# Altium PCB Fingerboardv5_Commerical_China.PcbDoc
Units mil, origin at the board's own origin, x right, y up, seen from the top; angles counter-clockwise.
Board outline 600 x 1050 mil, 2 copper layers (Top Layer, Bottom Layer); 12 components, 14 nets, 70 pads, 13 vias.
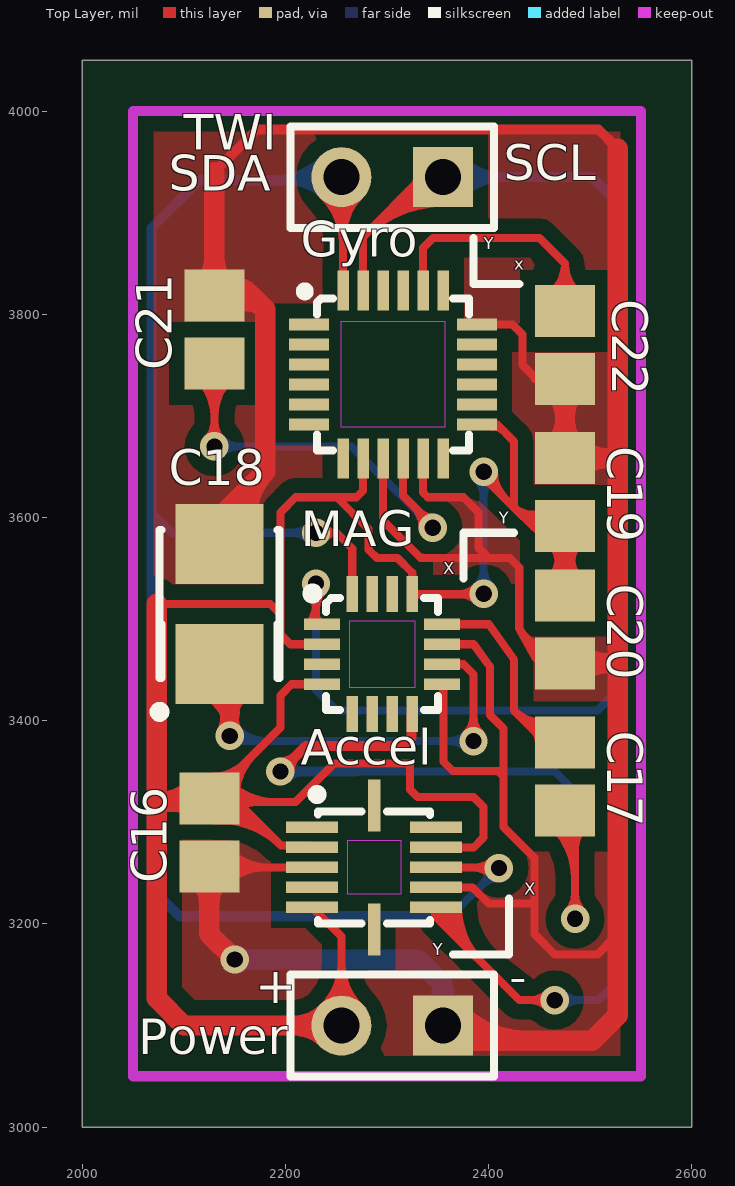
[diagram p0: Top Layer view]
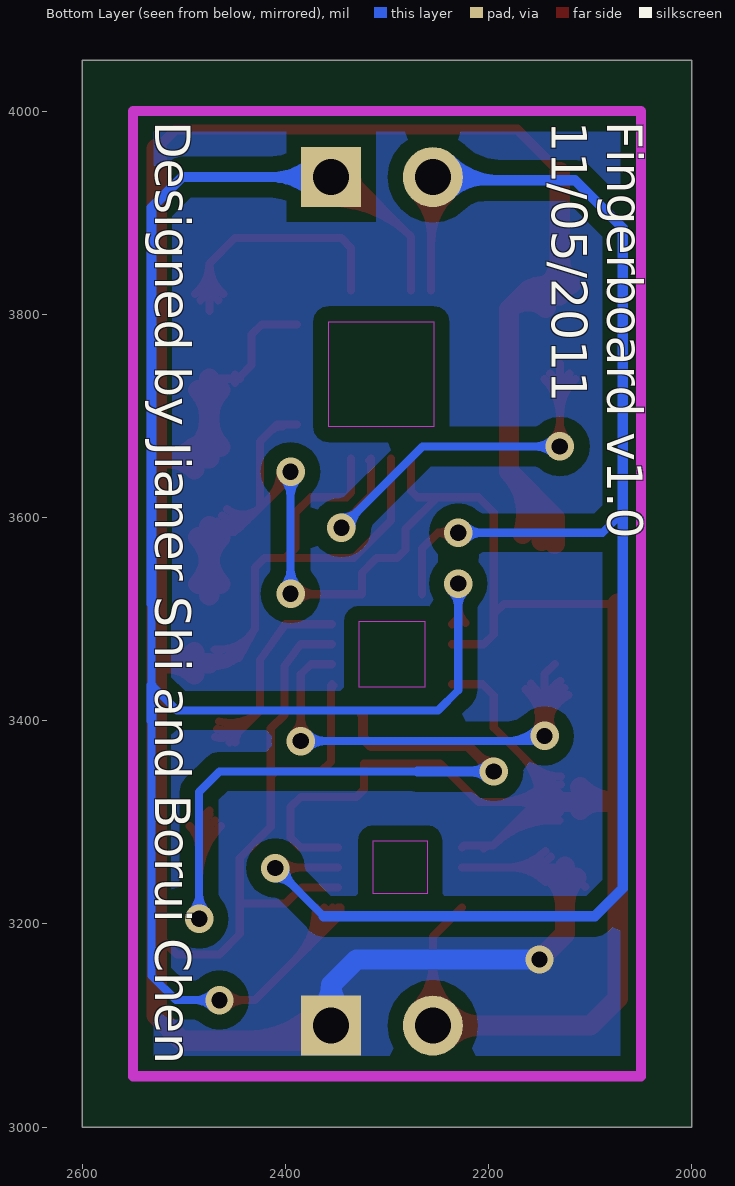
[diagram p1: Bottom Layer view, seen from below]

## Layer stack, top to bottom
Top Layer: signal copper 1.4
Dielectric: dielectric 12.6, FR-4, Dk 4.8
Bottom Layer: signal copper 1.4

## Board outline
2000,3000 2600,3000 2600,4050 2000,4050

## Design rules (kind name [scope] priority, off if disabled: settings)
Clearance "Polygon Clearance" [InPolygon] p1: gap=15
Clearance [All] p2: gap=8.1
HoleSize [All] p1: absolutevalues=TRUE maxlimit=100 minlimit=16 maxpercent=80.000 minpercent=20.000
MinimumAnnularRing [All] p1: minimumring=6
PolygonConnect [All] p1: connectstyle=Direct reliefconductorwidth=10 reliefentries=4 polygonreliefangle="90 Angle"
RoutingVias [All] p1: holewidth=16 width=28 viastyle="Through Hole" minholewidth=16 minwidth=27 maxholewidth=16 maxwidth=35
SilkscreenOverComponentPads [All] p1: minsilkscreentomaskgap=10
SolderMaskExpansion [All] p1: expansion=4
Width [All] p1: maxlimit=50 minlimit=8 preferedwidth=8
26 further rules are at their usual default settings.

## Classes and differential pairs
net class TWI[1..0]: TWI0 TWI1
net class AUX_TWI[1..0]: AUX_TWI0 AUX_TWI1
component class U_IMU3000: C19 C20 C21 C22 Gyro
component class U_HMC5883L: C17 C18 MAG
component class U_BMA180: Accel C16
component class Fingerboard: Power TWI

## Components (designator, comment, footprint, x,y, rotation, side; value= is the part's Value field where it differs from the comment)
Accel "BMA180" "BMA180 - ECESHOP" 2240,3295 r270 top
C16 "Cap Semi" CAPC2012N 2125,3290 r90 top
C17 "Cap Semi" CAPC2012N 2475,3345 r90 top
C18 "Cap Pol1" TC3528-1411 2135,3515 r90 top
C19 "Cap Semi" CAPC2012N 2475,3625 r270 top
C20 "Cap Semi" CAPC2012N 2475,3490 r90 top
C21 "Cap Semi" CAPC2012N 2130,3785 r270 top
C22 "Cap Semi" CAPC2012N 2475,3770 r90 top
Gyro "IMU3000" "IMU3000 - ECESHOP" 2235,3790 r0 top
MAG "HMC5883L" "HMC5883L - ECESHOP" 2245,3495 r0 top
Power "Header 2" HDR1X2 2355,3100 r180 top
TWI "TWI" HDR1X2 2355,3935 r180 top

## Footprints (in the part's own frame and the unit in brackets; to place one, negate y for a bottom-side part, rotate by r counter-clockwise, add the part's x,y. Pads: shape width x height; smd on the part's side, far side on the other; paste and mask are expansions set on the pad)
"BMA180 - ECESHOP" [mm] "BMA180 - ECESHOP"
  rect 0.29x1.3 smd: 1(0,-0.35) 2(0.5,-0.35) 3(1,-0.35) 4(1.5,-0.35) 5(2,-0.35) 7(2,2.75) 8(1.5,2.75) 9(1,2.75) 10(0.5,2.75) 11(0,2.75)
  rect 1.3x0.32 smd: 6(2.55,1.2) 12(-0.55,1.2)
  Keep-Out Layer region: 0.328,0.524 1.658,0.524 1.658,1.876 0.328,1.876
  silkscreen extent -0.91,-0.31 2.4,2.6
CAPC2012N [mm] "Chip Capacitor, Body 2.0x1.3mm, IPC Medium Density"
  rect 1.3x1.5 smd: 1(-0.85,0) 2(0.85,0)
  body extent -1.1,-0.72 1.1,0.72, height 1.1
HDR1X2 [mm] "Connector; Header; 2 Position"
  rect 1.5x1.5 hole 0.9: 1(0,0)
  round 1.5 hole 0.9: 2(2.54,0)
  silkscreen extent -1.27,-1.27 3.81,1.27
"HMC5883L - ECESHOP" [mm]
  rect 0.9x0.29 smd: 1(-0.225,0) 2(-0.225,-0.5) 3(-0.225,-1) 4(-0.225,-1.5) 9(2.775,-1.5) 10(2.775,-1) 11(2.775,-0.5) 12(2.775,0)
  rect 0.29x0.9 smd: 5(0.525,-2.25) 6(1.025,-2.25) 7(1.525,-2.25) 8(2.025,-2.25) 13(2.025,0.75) 14(1.525,0.75) 15(1.025,0.75) 16(0.525,0.75)
  Keep-Out Layer region: 0.452,-1.572 2.099,-1.572 2.099,0.075 0.452,0.075
  silkscreen extent -0.57,-2.15 2.67,0.87
"IMU3000 - ECESHOP" [mm]
  rect 1x0.29 smd: 1(-0.3,0) 2(-0.3,-0.5) 3(-0.3,-1) 4(-0.3,-1.5) 5(-0.3,-2) 6(-0.3,-2.5) 13(3.9,-2.5) 14(3.9,-2) 15(3.9,-1.5) 16(3.9,-1) 17(3.9,-0.5) 18(3.9,0)
  rect 0.29x1 smd: 7(0.55,-3.35) 8(1.05,-3.35) 9(1.55,-3.35) 10(2.05,-3.35) 11(2.55,-3.35) 12(3.05,-3.35) 19(3.05,0.85) 20(2.55,0.85) 21(2.05,0.85) 22(1.55,0.85) 23(1.05,0.85) 24(0.55,0.85)
  Keep-Out Layer region: 0.488,-2.562 3.109,-2.562 3.109,0.066 0.488,0.066
  silkscreen extent -0.48,-3.15 3.7,0.9
TC3528-1411 [mm] "Capacitor, SM Tantalum; Body 3.5 x 2.8 mm (LxW typ)"
  rect 2x2.2 smd: 1(-1.5,0) 2(1.5,0)
  silkscreen extent -2.82,-1.5 1.85,1.62

## Part data
C16 C17 C19 C20 C21 C22: "Capacitor (Semiconductor SIM Model)"
C18: "Polarized Capacitor (Radial)"
Power: "Header, 2-Pin"
TWI: library part "Header 2", "Header, 2-Pin"

## Via types
v1: diameter 28, hole 16, Top Layer to Bottom Layer, 13 vias

## Nets (pads, with @x,y where several pads share a name; then routed paths per layer and width w, separated by ;. In a path a pad name is that pad's centre, name@x,y a point inside that pad or via, vN(x,y) a via of type N, cw(c..) or ccw(c..) an arc to the next point about the centre after c; other vN are vias at no path point)
3.3VCC: Accel.2 Accel.5 Accel.10 C16.2 C19.2 C20.2 Gyro.8 Gyro.13 MAG.2 MAG.4 MAG.13 Power.2 | length 3692.5
  Top Layer w8: 2073.1,3515 2185,3515 2195,3505 ; C16.2 C16.2@2125.33,3323.46 ; C16.2@2128.79,3325.87 cw(c2131.14,3287.97) 2157.99,3314.82 ; C16.2@2128.94,3337.06 ccw(c2128.94,3361.15) C16.2@2145.97,3344.11 ; C16.2@2128.94,3345.06 ccw(c2128.94,3388.46) 2159.63,3357.77 ; C16.2@2129.28,3317.88 cw(c2132.61,3264.36) 2170.53,3302.28 ; C16.2@2129.78,3309.9 cw(c2134.07,3240.74) 2183.07,3289.74 ; C16.2@2130.27,3301.92 cw(c2135.54,3217.12) 2195.62,3277.19 ; C16.2@2131.54,3320 C16.2@2152.81,3320 ; C16.2@2138.55,3333.07 ccw(c2170.11,3364.64) 2170.11,3320 ; C16.2@2142.53,3323.46 cw(c2184.06,3323.46) 2154.69,3352.83 ; C16.2@2144.2,3308.2 cw(c2172.7,3279.7) 2172.7,3320 ; C16.2@2144.2,3338.73 ccw(c2189.43,3383.95) 2189.43,3320 ; C16.2@2150.53,3323.46 cw(c2211.37,3323.46) 2168.35,3366.49 ; 2195,3320 2210,3320 2247.9,3357.9 2322.66,3357.9 2322.66,3332.34 2330,3325 2385,3325 2395,3315 2395,3285 2385.32,3275.32 Accel.10 ; 2197.68,3277.19 cw(c2197.68,3266.66) Accel.2@2205.13,3274.11 ; 2205,3320 C16.2@2152.81,3320 ; Accel.5 2255,3187.48 Power.2 ; Accel.2 2224.34,3277.19 2195.62,3277.19 ; MAG.4 2205.95,3435.95 2195,3425 2195,3393.14 C16.2@2125.33,3323.46 ; MAG.2 2205.32,3475.32 2205,3475 2195,3485 2195,3505 ; Power.2@2236.95,3118.05 ccw(c2193.37,3161.63) 2255,3161.63 ccw(c2316.63,3161.63) Power.2@2273.05,3118.05 ; Power.2@2242.61,3112.39 ccw(c2212.68,3142.32) 2255,3142.32 ccw(c2297.32,3142.32) Power.2@2267.39,3112.39 ; Gyro.8 2276.34,3626.34 2270,3620 2250.37,3620 ; 2369.72,3524.53 ccw(c2369.72,3550.28) v1@2387.93,3532.07 ; 2372,3524.53 cw(c2372,3502) v1@2387.93,3517.93 ; Gyro.13 2408.43,3691.57 2425,3675 2425,3610 ; v1(2395,3525) 2394.53,3524.53 MAG.13 2324.72,3545.65 2310.37,3560 2290,3560 2281.77,3568.23 2281.77,3588.6 2250.37,3620 ; v1@2395,3635 cw(c2395,3622.93) 2403.54,3631.46 ; v1(2395,3645) 2395,3640 2425,3610 ; Gyro.13@2402.52,3689.87 cw(c2402.52,3671.48) 2415.52,3684.48 ; v1@2405,3645 ccw(c2441.21,3645) 2415.61,3619.39 ; 2431.28,3603.72 ccw(c2447.8,3620.24) C19.2@2462.5,3602.09 ; 2437.56,3597.44 ccw(c2453.42,3613.3) C19.2@2467.54,3595.88 ; 2443.84,3591.16 ccw(c2459.04,3606.36) C19.2@2472.58,3589.66 ; C19.2@2449.63,3594.1 cw(c2445,3594.66) 2445,3590 ; C19.2@2450.19,3586 ccw(c2445,3584.63) 2445,3590 ; C19.2@2457.47,3608.31 cw(c2442.17,3627.17) 2425,3610 ; C19.2 2473.46,3590 2445,3590 ; C16.2@2125.33,3323.46 2149.34,3323.46 C16.2@2152.81,3320 ; C16.2@2152.81,3320 2195.62,3277.19 ; 2195,3505 2195,3605 2210,3620 2250.37,3620 ; 2425,3610 2445,3590
  Top Layer w20: 2073.1,3515 2073.1,3320 ; 2075.06,3320 ccw(c2075.06,3369.47) C16.2@2110.04,3334.49 ; 2091.79,3320 cw(c2091.79,3294.19) C16.2@2110.04,3312.44 ; C16.2@2131.54,3320 2073.1,3320 ; Power.2@2241.19,3086.19 ccw(c2207.86,3052.86) 2207.86,3100 ccw(c2207.86,3147.14) Power.2@2241.19,3113.81 ; Power.2 2100,3100 2073.1,3126.9 2073.1,3320 ; C20.2@2463.98,3534.49 ccw(c2437.36,3561.1) 2475,3561.1 ccw(c2512.64,3561.1) C20.2@2486.02,3534.49 ; C19.2@2463.98,3580.51 cw(c2437.36,3553.9) 2475,3553.9 cw(c2512.64,3553.9) C19.2@2486.02,3580.51 ; C20.2 C19.2
  Bottom Layer w8: v1@2387.93,3532.07 ccw(c2370.86,3549.14) 2395,3549.14 ccw(c2419.14,3549.14) v1@2402.07,3532.07 ; v1@2387.93,3637.93 cw(c2370.86,3620.86) 2395,3620.86 cw(c2419.14,3620.86) v1@2402.07,3637.93 ; v1(2395,3525) v1@2400,3530 ; v1@2395,3535 v1(2395,3645) v1@2400,3640
AUX_TWI0: Gyro.7
AUX_TWI1: Gyro.6
GND: Accel.3 Accel.8 C16.1 C18.2 C19.1 C20.1 C21.1 C22.1 Gyro.9 Gyro.11 Gyro.18 MAG.9 MAG.11 Power.1 | length 4902.2
  Top Layer w8: C16.1@2105,3236.54 C16.1 2125.91,3255.63 Accel.3 ; C16.1@2138.55,3246.93 cw(c2159.56,3225.91) 2159.56,3255.63 ; C16.1@2138.55,3266.15 ccw(c2163.93,3291.53) 2163.93,3255.63 ; C16.1@2144.2,3241.27 cw(c2178.88,3206.6) 2178.88,3255.63 ; C16.1@2144.2,3271.8 ccw(c2183.25,3310.85) 2183.25,3255.63 ; Gyro.9 2296.02,3597.12 2332.74,3560.4 2334.6,3560.4 2335,3560 2400,3560 ; Gyro.11 2335.39,3624.61 2340,3620 2375,3620 2390,3605 2390,3570 2400,3560 ; Accel.8 2384.05,3235.95 2400,3220 2445,3220 ; MAG.9@2353.04,3434.74 cw(c2347.36,3429.05) 2355.4,3429.05 ; MAG.9 2355.4,3434.8 2355.4,3359.6 2364.6,3350.4 2409.2,3350.4 2414.6,3345 ; MAG.11 2385,3475.32 2401.1,3453.36 2401.1,3405.76 2414.6,3392.26 2414.6,3345 ; Gyro.18 2423.37,3790 2433.37,3780 2433.37,3750 2445,3738.37 2445,3736.63 ; 2430.02,3490.77 ccw(c2465.54,3510.45) C20.1@2469.68,3470.06 ; 2435.89,3480.17 ccw(c2466.88,3497.34) C20.1@2470.49,3462.1 ; 2441.76,3469.57 ccw(c2468.23,3484.23) C20.1@2471.31,3454.14 ; C22.1@2449.83,3732.61 ccw(c2445,3731.71) 2445,3736.63 ; C22.1@2449.87,3740.64 cw(c2445,3741.58) 2445,3736.63 ; C20.1@2470.59,3460.95 C20.1 2446.1,3461.75 2430,3490.81 2430,3550.69 2420.69,3560 2400,3560 ; C22.1 2474.91,3736.63 2445,3736.63 ; 2526.9,3190 2506.9,3170 2465,3170 2445,3190 2445,3220 ; 2414.6,3345 2414.6,3295.4 2445,3265 2445,3220
  Top Layer w10: 2130,3940 2171.9,3981.9 2508.1,3981.9 2525,3965
  Top Layer w20: C16.1@2113.98,3245.51 cw(c2087.36,3218.9) 2125,3218.9 cw(c2162.64,3218.9) C16.1@2136.02,3245.51 ; C21.1@2118.98,3829.49 ccw(c2092.36,3856.1) 2130,3856.1 ccw(c2167.64,3856.1) C21.1@2141.02,3829.49 ; C16.1 2125,3190 v1(2150,3165) ; 2130,3940 C21.1 2166.54,3818.46 ; C21.1@2131.1,3821.84 cw(c2147.07,3802.88) 2164.59,3820.41 ; C18.2 2135,3600 2180,3645 ; C21.1@2143.98,3806.54 cw(c2161.15,3786.15) 2180,3805 ; C21.1@2146.07,3808.68 cw(c2166.53,3792.18) 2166.53,3818.46 ; C21.1@2146.07,3828.25 ccw(c2166.53,3844.75) 2166.53,3818.46 ; C18.2@2147.74,3577.27 cw(c2188.5,3592.14) 2157.82,3622.82 ; C18.2@2166.53,3584.12 cw(c2221,3604) 2180,3645 ; Power.1@2354.67,3099.67 ccw(c2390.07,3135.07) 2390.07,3085 ; Power.1 2370,3085 2501.9,3085 2526.9,3110 2526.9,3190 2526.9,3460 ; Power.1@2368.81,3113.81 ccw(c2438.36,3183.36) 2438.36,3085 ; C19.1@2463.98,3669.49 ccw(c2437.36,3696.1) 2475,3696.1 ccw(c2512.64,3696.1) C19.1@2486.02,3669.49 ; C22.1@2463.98,3725.51 cw(c2437.36,3698.9) 2475,3698.9 cw(c2512.64,3698.9) C22.1@2486.02,3725.51 ; C20.1 2523.44,3456.54 2526.9,3460 ; C22.1 C19.1 2523.44,3658.46 2526.9,3655 ; C20.1@2489.96,3445.51 cw(c2516.58,3418.9) 2516.58,3456.54 cw(c2516.58,3494.17) C20.1@2489.96,3467.56 ; C19.1@2489.96,3647.44 cw(c2516.58,3620.83) 2516.58,3658.46 cw(c2516.58,3696.1) C19.1@2489.96,3669.49 ; 2526.9,3963.1 2526.9,3655 ; 2166.54,3818.46 2180,3805 ; 2180,3645 2180,3805 ; 2526.9,3460 2526.9,3655
  Bottom Layer w20: v1(2150,3165) 2330,3165 2355,3140 ; Power.1@2342.99,3115.4 ccw(c2323.8,3140) 2355,3140 ; Power.1 2355,3140 ; Power.1@2367.01,3115.4 cw(c2386.2,3140) 2355,3140
NetAccel_4: Accel.4
NetC17_1: C17.1 MAG.8 | length 995
  Top Layer w8: C17.1@2463.67,3296.27 cw(c2412.18,3244.77) 2485,3244.77 ; C17.1@2469.33,3301.93 cw(c2431.49,3264.09) 2485,3264.09 ; C17.1@2474.98,3307.58 cw(c2450.8,3283.4) 2485,3283.4 ; C17.1 2485,3301.54 v1(2485,3205) ; v1@2477.93,3212.07 ccw(c2460.86,3229.14) 2485,3229.14 ccw(c2509.14,3229.14) v1@2492.07,3212.07 ; 2485,3274.05 cw(c2516.42,3274.05) C17.1@2494.2,3296.27
  Top Layer w10: v1(2195,3350) 2220,3375 2315.57,3375 2323.85,3383.27 2323.85,3405.54 MAG.8 ; v1@2195,3359 ccw(c2195,3380.73) 2210.36,3365.36 ccw(c2225.73,3350) v1@2204,3350
  Bottom Layer w8: 2270,3350 2465,3350 2485,3330 v1(2485,3205) ; v1@2477.93,3212.07 ccw(c2460.86,3229.14) 2485,3229.14 ccw(c2509.14,3229.14) v1@2492.07,3212.07
  Bottom Layer w10: v1(2195,3350) 2270,3350 ; v1@2201.36,3343.64 cw(c2216.73,3328.27) 2216.73,3350 cw(c2216.73,3371.73) v1@2201.36,3356.36
NetC17_2: C17.2 MAG.12 | length 302.6
  Top Layer w8: MAG.12 2400,3495 2425,3460 2425,3410 ; 2434.74,3400.26 ccw(c2458.59,3424.1) C17.2@2467.48,3391.57 ; C17.2@2449.47,3378.46 ccw(c2432.42,3378.46) 2444.48,3390.52 ccw(c2462.77,3408.8) C17.2@2469.59,3383.86 ; C17.2@2455,3378.46 2455,3380 2425,3410 ; C17.2@2465.37,3399.29 cw(c2454.4,3439.4) 2425,3410
NetC18_1: C18.1 MAG.10 | length 897
  Top Layer w8: C18.1@2121.46,3425.19 cw(c2098.48,3384.74) v1@2145,3384.74 ; C18.1@2125.41,3432.15 cw(c2106.29,3398.49) v1@2145,3398.49 ; C18.1@2129.37,3439.1 cw(c2114.1,3412.24) 2145,3412.24 ; C18.1 2145,3445.94 v1(2145,3385) ; v1@2136.34,3390.01 ccw(c2115.71,3401.95) 2138.74,3408.12 ccw(c2161.46,3414.2) v1@2149.91,3393.71 ; v1@2137.13,3391.17 ccw(c2118.39,3405.84) 2141.38,3412 ; v1@2137.93,3392.07 ccw(c2120.86,3409.14) 2145,3409.14 ccw(c2169.14,3409.14) v1@2152.07,3392.07 ; v1@2140,3393.66 ccw(c2128.01,3414.42) 2151.17,3408.22 ; 2144.31,3401.08 ccw(c2156.11,3404.24) v1@2150,3393.66 ; v1@2145,3385.19 cw(c2209.69,3385.19) C18.1@2163.95,3430.93 ; 2145,3404.51 cw(c2190.38,3404.51) C18.1@2158.29,3436.59 ; 2151.23,3408.45 ccw(c2174.71,3402.16) v1@2153.66,3390 ; MAG.10 2375.1,3455.63 2385,3445.73 v1(2385,3380) ; v1@2377.93,3387.07 ccw(c2360.86,3404.14) 2385,3404.14 ccw(c2409.14,3404.14) v1@2392.07,3387.07
  Bottom Layer w8: v1(2145,3385) 2150,3380 v1(2385,3380) ; v1@2146.41,3386.41 ccw(c2161.9,3401.9) 2161.9,3380 ; v1@2152.07,3392.07 ccw(c2181.21,3421.21) 2181.21,3380 ; v1@2377.93,3372.93 ccw(c2360.86,3355.86) 2360.86,3380 ccw(c2360.86,3404.14) v1@2377.93,3387.07
NetC21_2: C21.2 Gyro.10 | length 697.7
  Top Layer w8: C21.2@2114.73,3736.27 cw(c2077.88,3699.41) 2130,3699.41 cw(c2182.12,3699.41) C21.2@2145.27,3736.27 ; C21.2@2120.39,3741.93 cw(c2097.19,3718.72) 2130,3718.72 cw(c2162.81,3718.72) C21.2@2139.61,3741.93 ; v1@2122.93,3677.07 ccw(c2105.86,3694.14) 2130,3694.14 ccw(c2154.14,3694.14) v1@2137.07,3677.07 ; v1(2130,3670) C21.2 ; Gyro.10@2317.58,3656.23 Gyro.10 2315.71,3621.52 2345,3592.23 v1(2345,3590) ; 2326.35,3610.88 cw(c2305.47,3590) v1@2335,3590 ; 2331.74,3605.49 ccw(c2345,3618.76) v1@2345,3600
  Bottom Layer w8: v1(2130,3670) 2265,3670 v1(2345,3590) ; v1@2137.07,3662.93 cw(c2154.14,3645.86) 2154.14,3670 cw(c2154.14,3694.14) v1@2137.07,3677.07 ; v1@2335,3590 ccw(c2310.86,3590) 2327.93,3607.07 ccw(c2345,3624.14) v1@2345,3600
NetC22_2: C22.2 Gyro.20 | length 353.8
  Top Layer w8: Gyro.20 2335.39,3865.39 2345,3875 2450,3875 2475,3850 ; C22.2@2461.06,3819.95 ccw(c2435.65,3850) 2475,3850 ; C22.2@2466.22,3813.84 ccw(c2450.23,3832.76) 2475,3832.76 ccw(c2499.77,3832.76) C22.2@2483.78,3813.84 ; C22.2 2475,3850 ; C22.2@2488.94,3819.95 cw(c2514.35,3850) 2475,3850
NetGyro_12: Gyro.12
NetINT_3: MAG.15
TWI0: Accel.7 Gyro.23 MAG.1 TWI.1 | length 2534.7
  Top Layer w8: MAG.1@2222.93,3496.21 ccw(c2205.85,3513.29) 2230,3513.29 ; v1@2222.93,3527.93 cw(c2205.86,3510.86) 2230,3510.86 cw(c2254.14,3510.86) v1@2237.07,3527.93 ; v1(2230,3535) 2230,3501.14 MAG.1 ; Gyro.23 2276.34,3876.34 2335,3935 TWI.1 ; 2277.28,3877.28 cw(c2355,3799.56) TWI.1@2355,3909.47 ; 2290.94,3890.94 cw(c2355,3826.87) TWI.1@2355,3917.47 ; 2304.59,3904.59 cw(c2355,3854.19) TWI.1@2355,3925.47 ; 2318.25,3918.25 cw(c2355,3881.5) TWI.1@2355,3933.47 ; TWI.1@2325.56,3925.56 ccw(c2316.13,3935) TWI.1@2329.47,3935 ; Accel.7@2345.86,3216.26 ccw(c2363.04,3216.26) 2350.89,3204.11 ; Accel.7 2348.27,3206.73 2430,3125 v1(2465,3125) ; Accel.7@2353.86,3216.26 ccw(c2390.36,3216.26) 2364.55,3190.45 ; Accel.7@2361.86,3216.26 ccw(c2417.67,3216.26) 2378.21,3176.79 ; Accel.7@2369.86,3216.26 ccw(c2444.98,3216.26) 2391.86,3163.14 ; v1@2457.93,3117.93 ccw(c2440.86,3100.86) 2440.86,3125 ccw(c2440.86,3149.14) v1@2457.93,3132.07
  Bottom Layer w8: v1@2222.93,3527.93 cw(c2205.86,3510.86) 2230,3510.86 cw(c2254.14,3510.86) v1@2237.07,3527.93 ; v1(2230,3535) 2230,3430 2250,3410 2506.9,3410 2531.9,3435 2531.9,3515 ; v1(2465,3125) 2507.9,3125 2531.9,3149 2531.9,3400 ; v1@2472.07,3117.93 cw(c2489.14,3100.86) 2489.14,3125 cw(c2489.14,3149.14) v1@2472.07,3132.07
  Bottom Layer w10: TWI.1 2501.9,3935 2531.9,3905 2531.9,3515 ; TWI.1@2365.27,3924.73 cw(c2390.07,3899.93) 2390.07,3935 cw(c2390.07,3970.07) TWI.1@2365.27,3945.27 ; TWI.1@2372.34,3917.66 cw(c2414.21,3875.79) 2414.21,3935 cw(c2414.21,3994.21) TWI.1@2372.34,3952.34 ; 2531.9,3400 2531.9,3435
TWI1: Accel.9 Gyro.24 MAG.16 TWI.2 | length 2103.6
  Top Layer w8: v1(2230,3585) 2250,3585 ; TWI.2@2236.95,3916.95 cw(c2189.38,3869.38) 2256.65,3869.38 ; v1@2238,3579 cw(c2250,3570) 2250,3585 ; v1@2238,3591 ccw(c2250,3600) 2250,3585 ; TWI.2@2242.61,3922.61 cw(c2208.69,3888.69) 2256.65,3888.69 ; TWI.2 2256.65,3933.35 Gyro.24 ; 2256.65,3877.36 cw(c2312.64,3877.36) TWI.2@2273.05,3916.95 ; 2256.65,3896.68 cw(c2293.32,3896.68) TWI.2@2267.39,3922.61 ; MAG.16 2265.67,3569.33 2250,3585 ; Accel.9 2409.37,3255.63 v1(2410,3255) v1@2404.37,3260.63 ; 2384.34,3255.63 cw(c2384.34,3229.34) v1@2402.93,3247.93 ; 2387.38,3255.63 ccw(c2387.38,3277.62) v1@2402.93,3262.07
  Bottom Layer w8: 2068.1,3605 2088.1,3585 v1(2230,3585) ; v1@2222.93,3577.93 ccw(c2205.86,3560.86) 2205.86,3585 ccw(c2205.86,3609.14) v1@2222.93,3592.07 ; 2362.5,3207.5 v1(2410,3255) ; v1@2400,3255 cw(c2375.86,3255) 2392.93,3237.93 cw(c2410,3220.86) v1@2410,3245
  Bottom Layer w10: 2188.3,3931.9 ccw(c2188.3,4001.7) TWI.2@2237.66,3952.34 ; 2203.27,3931.9 cw(c2203.27,3883.27) TWI.2@2237.66,3917.66 ; 2212.44,3931.9 ccw(c2212.44,3977.56) TWI.2@2244.73,3945.27 ; TWI.2 2251.9,3931.9 2115,3931.9 2068.1,3885 2068.1,3605 2068.1,3235 2095.6,3207.5 2362.5,3207.5
pads on no net: Accel.1 Accel.6 Accel.11 Accel.12 Gyro.1 Gyro.2 Gyro.3 Gyro.4 Gyro.5 Gyro.14 Gyro.15 Gyro.16 Gyro.17 Gyro.19 Gyro.21 Gyro.22 MAG.3 MAG.5 MAG.6 MAG.7 MAG.14

## Polygon pours and split planes (outlines as drawn)
GND on Bottom Layer "Bottom Layer-GND" (solid, pour order 4): 2025,4025 2575,4025 2575,3025 2025,3025
GND on Top Layer "Top Layer-GND" (solid, pour order 2): 2025,4025 2575,4025 2575,3025 2025,3025

## Keep-outs
Keep-Out Layer:
  lines w10: 2050,3050 2050,4000 2550,4000 2550,3050 2050,3050

## Silkscreen, mask and mechanical layers (free items; w line width, h text height)
Top Overlay:
  lines w8: 2365,3170 2420,3170 2420,3225 ; 2375,3540 2375,3585 2425,3585 ; 2385,3875 2385,3830 2430,3830
  text "SCL" at 2415,3920 h60
  text "SDA" at 2085,3910 h60
  text "Y" at 2395,3860 h20
  text "x" at 2425,3840 h20
  text "Y" at 2410,3590 h20
  text "X" at 2355,3540 h20
  text "X" at 2435,3225 h20
  text "Y" at 2345,3165 h20
  text "-" at 2420,3120 h60
  text "+" at 2170,3110 h60
Bottom Overlay:
  text "Fingerboard v1.0" at 2095,3990 h60 r90
  text "11/05/2011" at 2150,3990 h60 r90
  text "Designed by Jianer Shi and Borui Chen" at 2540,3990 h60 r90
Mechanical 4:
  lines w10: 2050,3050 2050,4000 2550,4000 2550,3050 2050,3050

## Dimensions
2050,3050 to 2050,4000 on Mechanical 1
2050,3050 to 2550,3050 on Mechanical 1